# Altium PCB 175-00016_rev1 SuperFin GPIO Apps Board_Old#2.PcbDoc
Units mm, origin at the board's own origin, x right, y up, seen from the top; angles counter-clockwise.
Board outline 84 x 34.5 mm, 6 copper layers (Top Layer, Mid-Layer 1, Internal Plane 1, Internal Plane 2, Internal Plane 3, Bottom Layer); 53 components, 119 nets, 342 pads, 62 vias.
Unrouted connection lines stored in the file: 75.
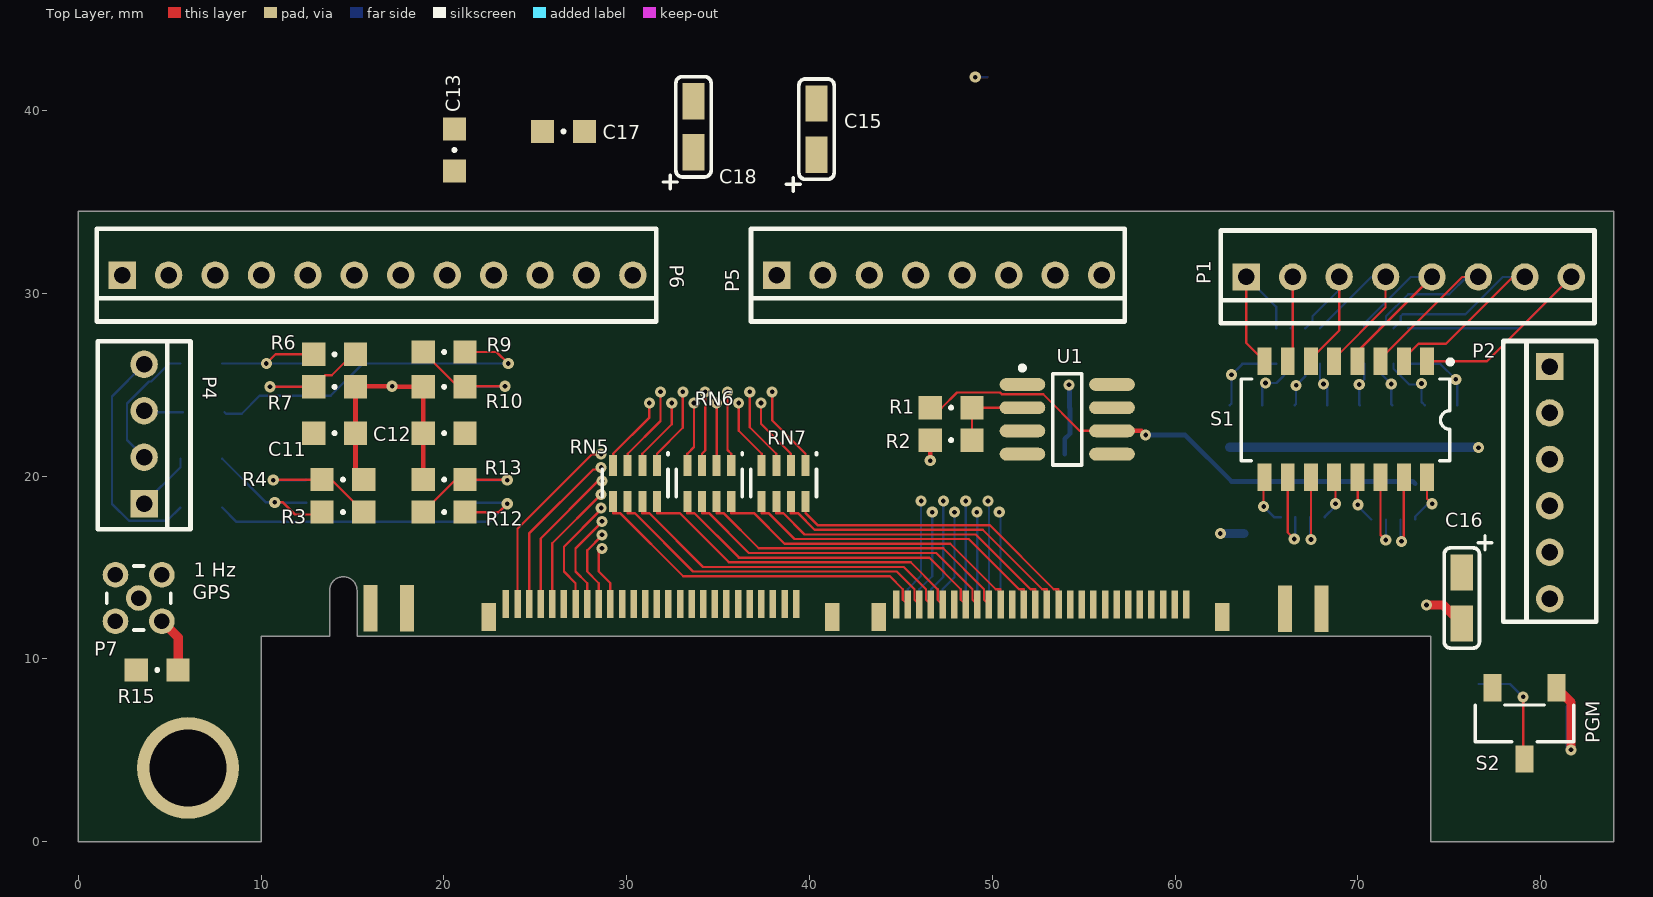
[diagram p0: Top Layer view]
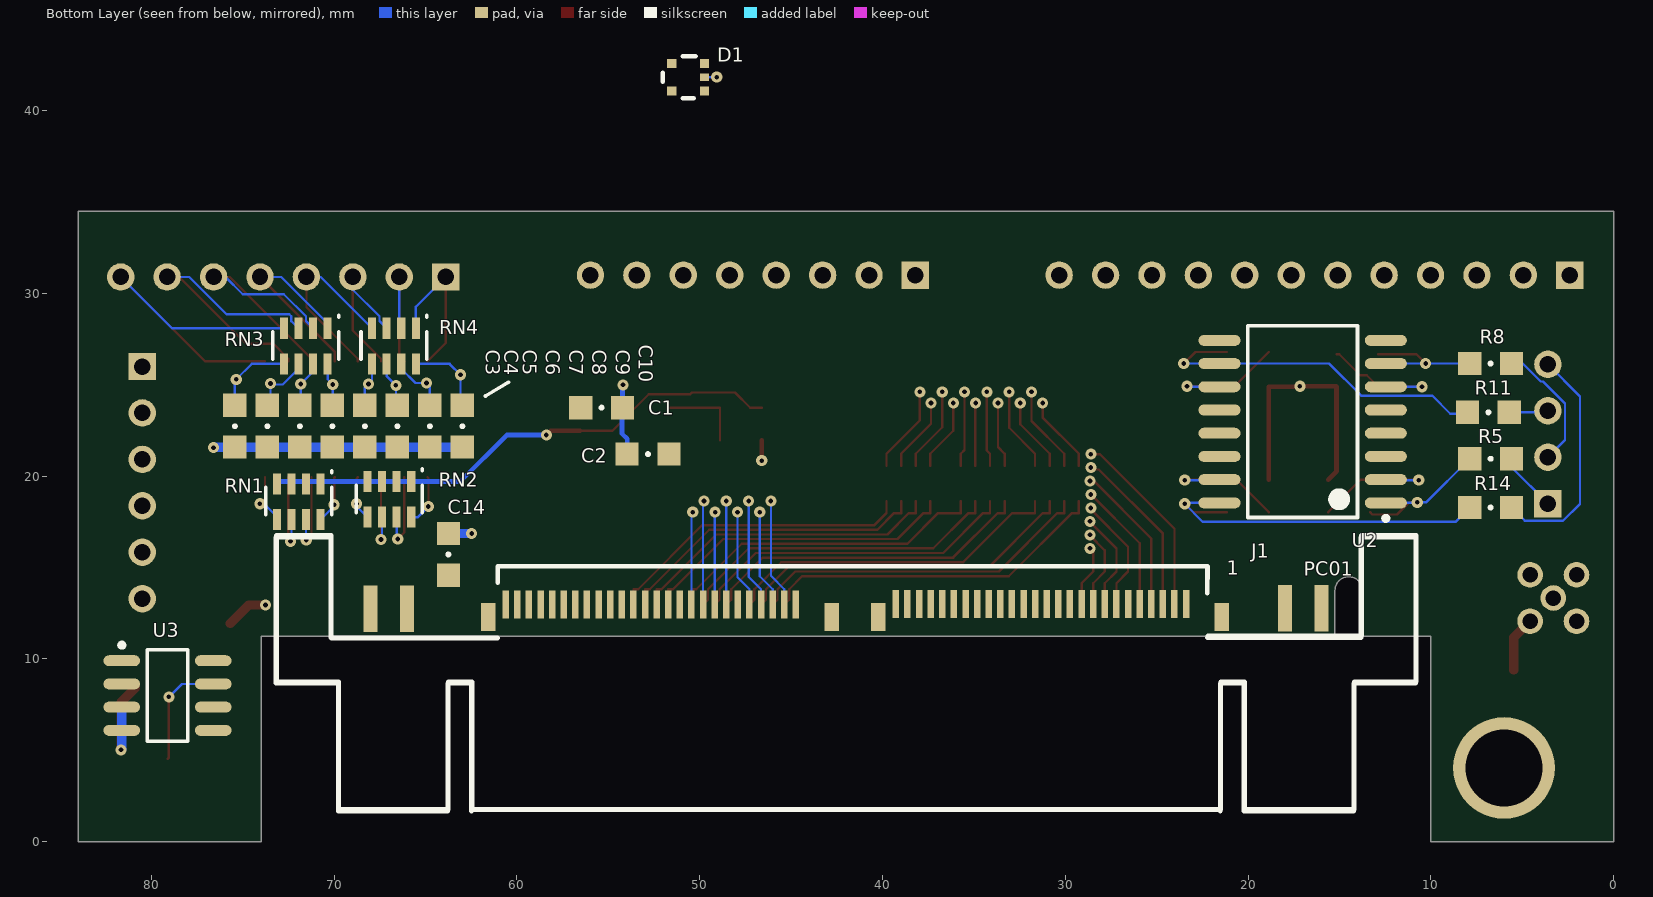
[diagram p1: Bottom Layer view, seen from below]
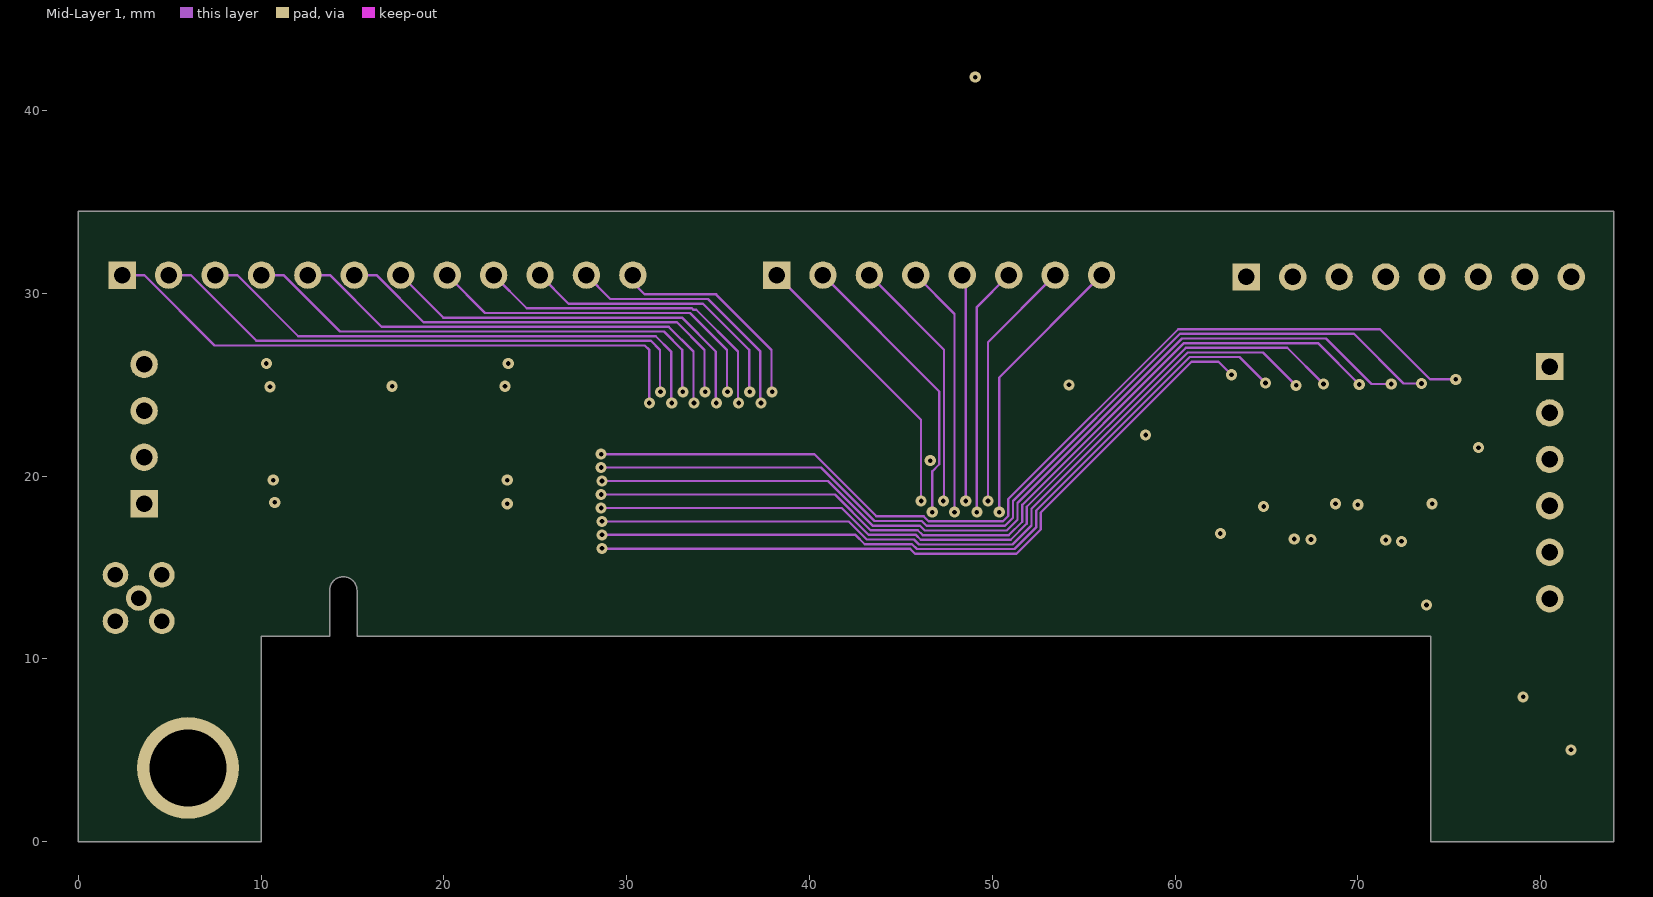
[diagram p2: Mid-Layer 1]
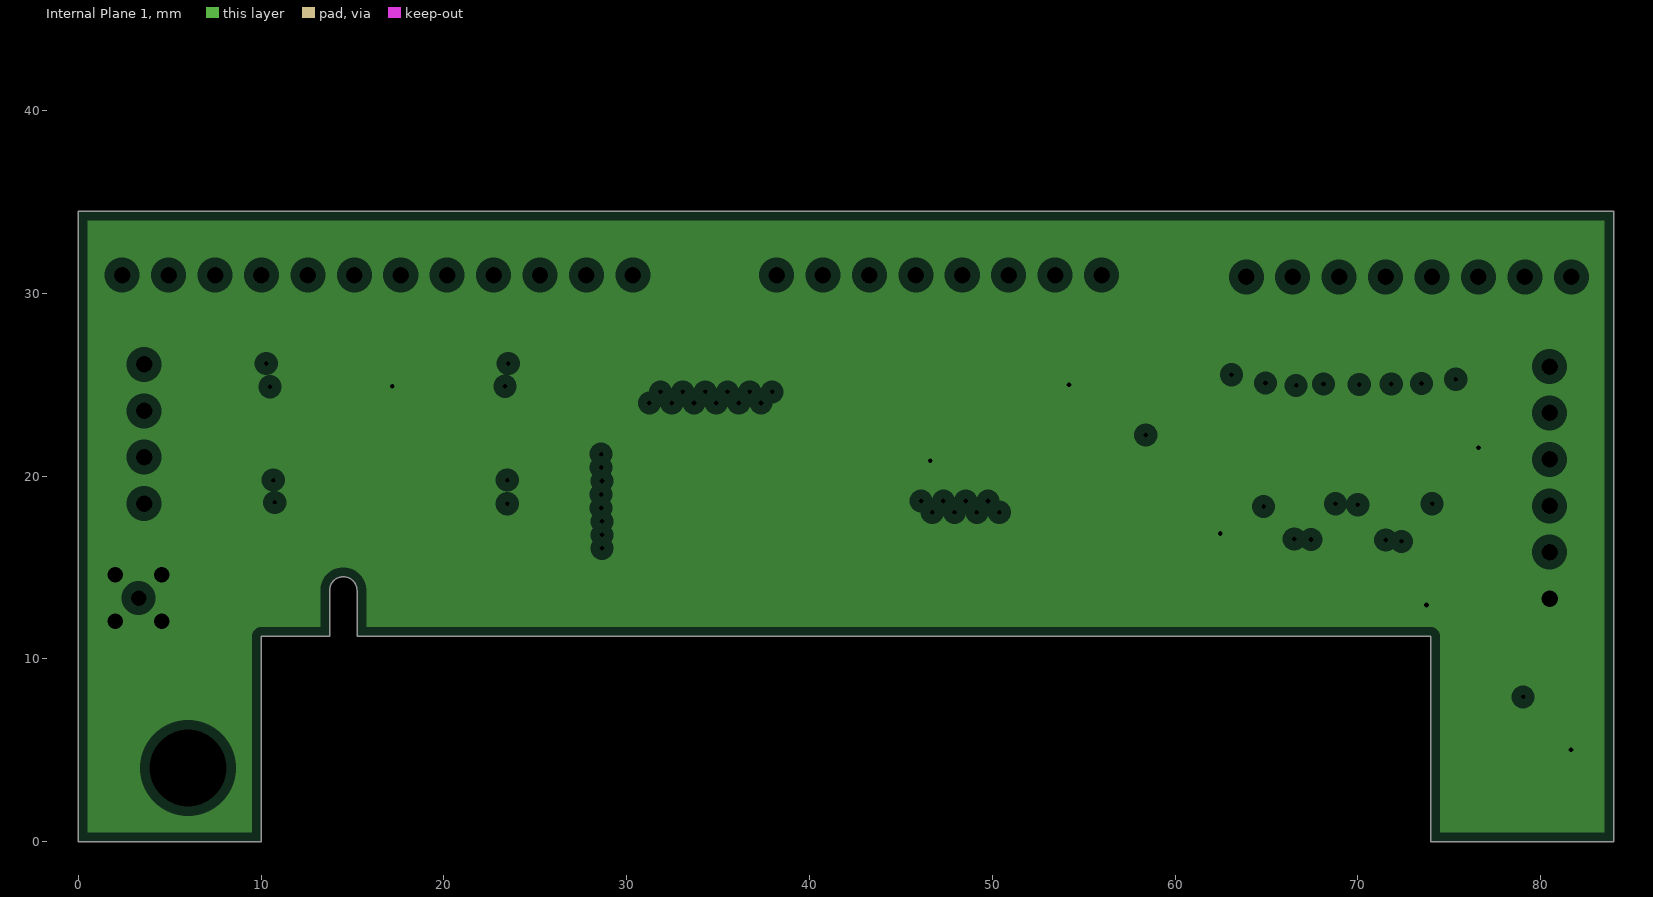
[diagram p3: Internal Plane 1, clearances drawn from the general rule]
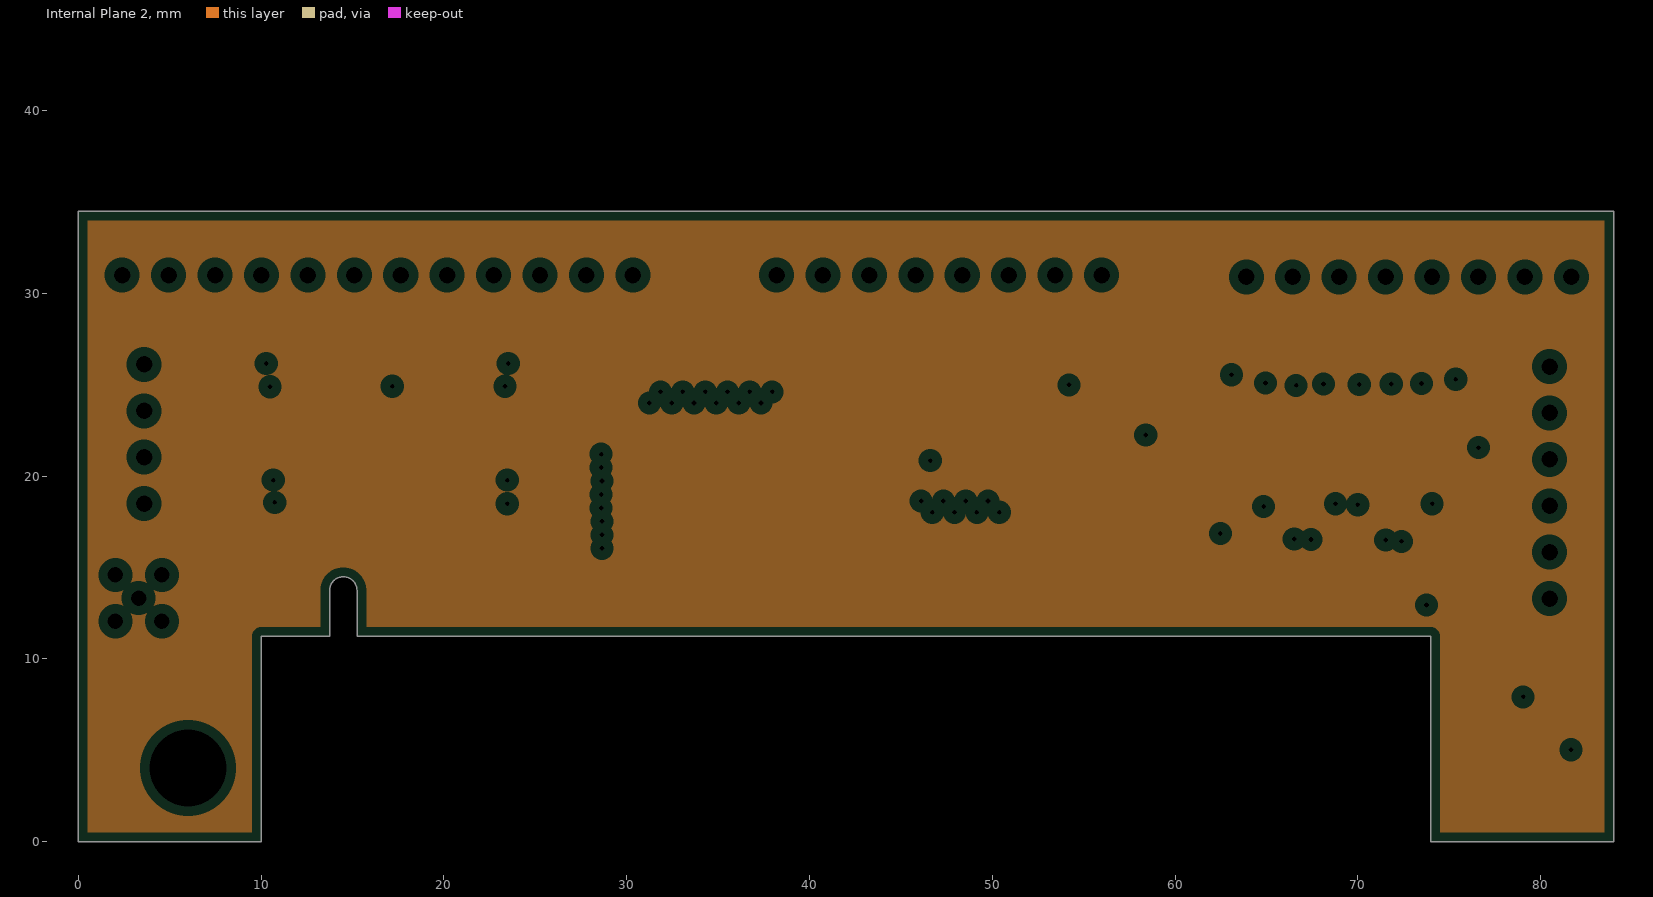
[diagram p4: Internal Plane 2, clearances drawn from the general rule]
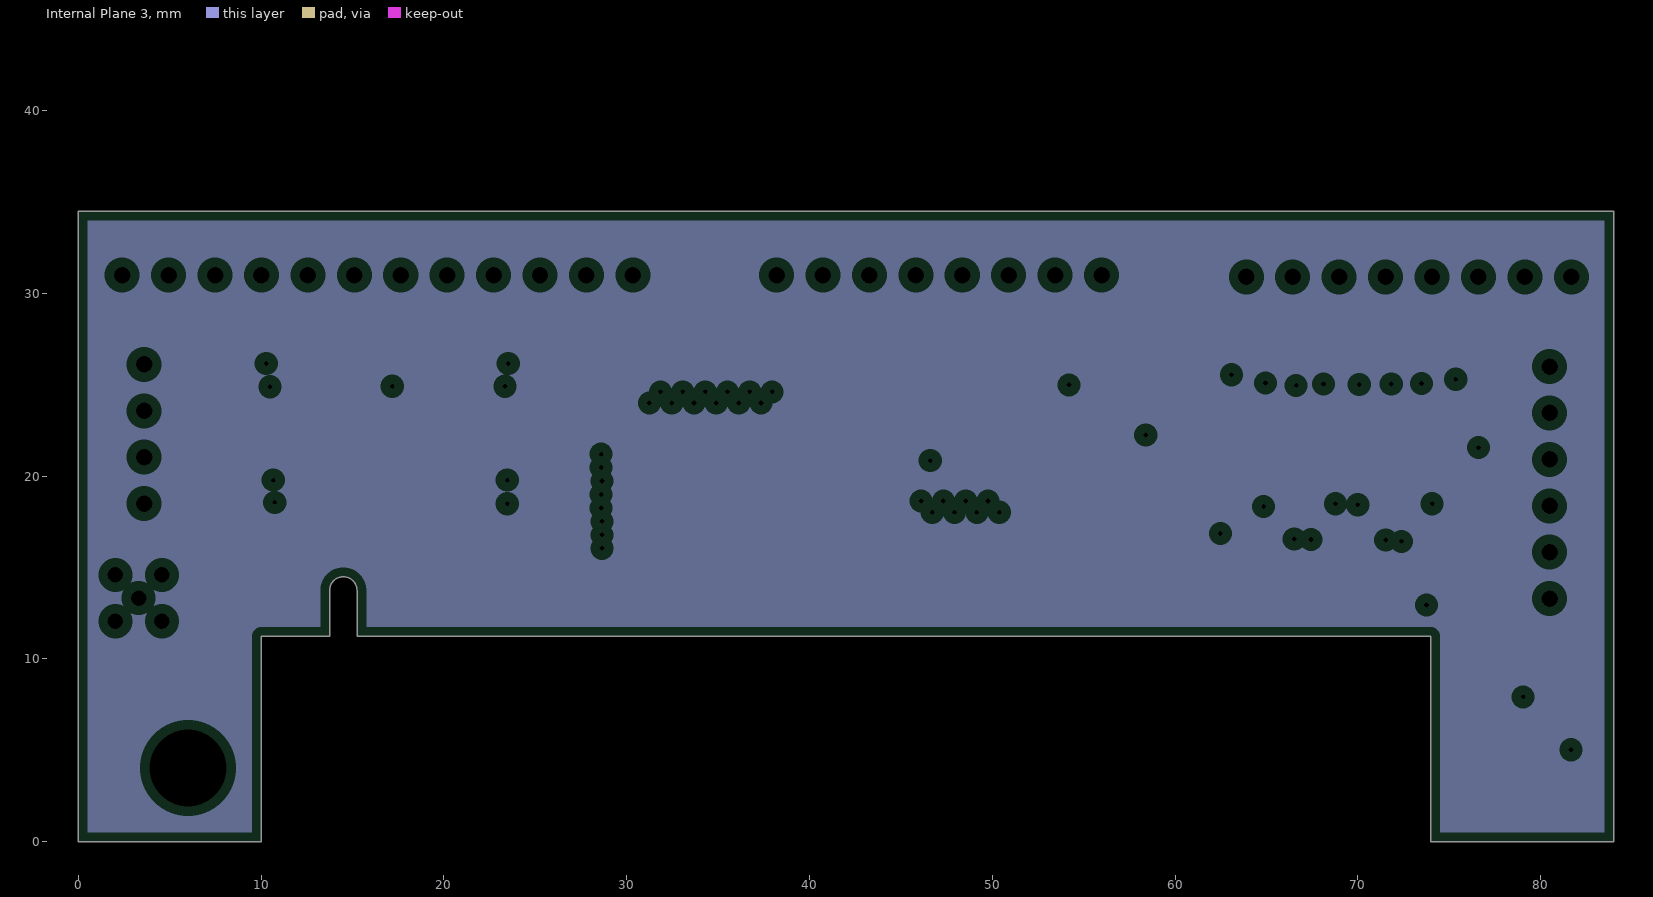
[diagram p5: Internal Plane 3, clearances drawn from the general rule]

## Layer stack, top to bottom
Top Layer: signal copper 0.0356
Dielectric: core 0.32, FR-4, Dk 4.8
Mid-Layer 1: signal copper 0.0356
Dielectric: prepreg 0.32, FR-4, Dk 4.8
Internal Plane 1: plane copper 0.0356, net GND
Dielectric: core 0.32, FR-4, Dk 4.8
Internal Plane 2: plane copper 0.0356, net +12V
Dielectric: prepreg 0.32, FR-4, Dk 4.8
Internal Plane 3: plane copper 0.0356, net -12V
Dielectric: core 0.32, FR-4, Dk 4.8
Bottom Layer: signal copper 0.0356

## Board outline
0,0 0,34.5 84,34.5 84,11.25 84,0 74,0 74,11.25 15.247,11.25 15.247,13.75 ccw(c14.497,13.75) 13.747,13.75 13.747,11.25 10,11.25 10,0

## Design rules (kind name [scope] priority, off if disabled: settings)
Clearance [All] p1: gap=0.127
ComponentClearance ComponentClearance_1 [(InComponent('J1'))] p1: gap=-10 collisioncheckmode=3 verticalgap=-10 showdistances=FALSE
ComponentClearance [All] p2: gap=0.254 collisioncheckmode=3 verticalgap=0.254 showdistances=FALSE
HoleSize [All] p1: absolutevalues=TRUE maxlimit=5.08 minlimit=0.025 maxpercent=80.000 minpercent=20.000
MinimumSolderMaskSliver [All] p1: minsoldermaskwidth=0.025
PlaneClearance [All] p1: clearance=0.508
PlaneConnect [All] p1: planeconnectstyle=Relief reliefexpansion=0.508 reliefentries=4 reliefconductorwidth=0.254 reliefairgap=0.254
PolygonConnect [All] p1: connectstyle=Relief reliefconductorwidth=0.254 reliefentries=4 polygonreliefangle="90 Angle"
RoomDefinition "780-00019 Rev1 Pg1" [InComponentClass('780-00019 Rev1 Pg1')] p1: confinementstyle=ConfineIn formatcopy=TRUE lockcomponents=FALSE outline 0.573,-14.554 83.427,-14.554 83.427,33.932 0.573,33.932
RoutingVias [All] p1: holewidth=0.254 width=0.61 viastyle="Through Hole" minholewidth=0.254 minwidth=0.61 maxholewidth=0.711 maxwidth=1.27
SilkToSilkClearance [All] p1: silktosilkclearance=0.025
SilkscreenOverComponentPads [All] p1: minsilkscreentomaskgap=0.025
SolderMaskExpansion [All] p1: expansion=0.102
Width [All] p1: maxlimit=0.508 minlimit=0.127 preferedwidth=0.127
21 further rules are at their usual default settings.

## Components (designator, comment, footprint, x,y, rotation, side; value= is the part's Value field where it differs from the comment)
C1 "Cap SMD" SMD_0805 55.372,23.749 r180 bottom
C2 "Cap SMD" SMD_0805 52.832,21.209 r0 bottom
C3 "Cap SMD" SMD_0805 75.438,22.733 r90 bottom
C4 "Cap SMD" SMD_0805 73.66,22.733 r90 bottom
C5 "Cap SMD" SMD_0805 71.882,22.733 r90 bottom
C6 "Cap SMD" SMD_0805 70.104,22.733 r90 bottom
C7 "Cap SMD" SMD_0805 68.326,22.733 r90 bottom
C8 "Cap SMD" SMD_0805 66.548,22.733 r90 bottom
C9 "Cap SMD" SMD_0805 64.77,22.733 r90 bottom
C10 "Cap SMD" SMD_0805 62.992,22.733 r90 bottom
C11 "Cap SMD" SMD_0805 14.018,22.352 r0 top
C12 "Cap SMD" SMD_0805 20.018,22.352 r180 top
C13 "Cap SMD" SMD_0805 20.574,37.846 r90 top
C14 "Cap SMD" SMD_0805 63.754,15.723 r90 bottom
C15 "16V" SMD_CAP_3216 40.386,38.989 r270 top
C16 "16V" SMD_CAP_3216 75.692,13.335 r90 top
C17 "Cap SMD" SMD_0805 26.543,38.862 r0 top
C18 "16V" SMD_CAP_3216 33.655,39.116 r270 top
D1 "PESD3V3L4UG" SOT-353 49.733,41.072 r0 bottom
J1 "QMSS-EM-PC4-104pin" "QMS EDGE PWR PINS - 104 PIN" 42,11.25 r180 bottom locked
P1 "Header 8" "HDR1X8 for IDC" 63.9,30.9 r0 top
P2 "Header 6" "HDR1X6 for IDC" 80.5,26 r270 top
P4 "Header 4" "HDR1X4 for IDC" 3.6,18.5 r90 top
P5 "Header 8" "HDR1X8 for IDC" 38.2,31 r0 top
P6 "Header 12" "HDR1X12 for IDC" 2.4,31 r0 top
P7 "COAX MMCX" MMCX2.54-V5 3.302,13.335 r0 top
R1 "Res 0805" SMD_0805 47.752,23.749 r180 top
R2 "Res 0805" SMD_0805 47.752,21.971 r0 top
R3 "Res 0805" SMD_0805 14.478,18.034 r180 top
R4 "Res 0805" SMD_0805 14.478,19.812 r180 top
R5 "Res 0805" SMD_0805 6.731,20.955 r0 bottom
R6 "Res 0805" SMD_0805 14.018,26.67 r180 top
R7 "Res 0805" SMD_0805 14.018,24.892 r180 top
R8 "Res 0805" SMD_0805 6.731,26.162 r0 bottom
R9 "Res 0805" SMD_0805 20.018,26.797 r0 top
R10 "Res 0805" SMD_0805 20.018,24.892 r0 top
R11 "Res 0805" SMD_0805 6.858,23.495 r0 bottom
R12 "Res 0805" SMD_0805 20.018,18.034 r0 top
R13 "Res 0805" SMD_0805 20.018,19.812 r0 top
R14 "Res 0805" SMD_0805 6.731,18.288 r0 bottom
R15 "Res 0805" SMD_0805 4.318,9.398 r180 top
RN1 "RES ARRAY  x4 10K" "RES ARRAY 0603 x 4" 70.739,19.685 r0 bottom
RN2 "RES ARRAY  x4 10K" "RES ARRAY 0603 x 4" 65.786,19.812 r0 bottom
RN3 "RES ARRAY  x4 10K" "RES ARRAY 0603 x 4" 70.358,28.194 r0 bottom
RN4 "RES ARRAY  x4 10K" "RES ARRAY 0603 x 4" 65.532,28.194 r0 bottom
RN5 "RES ARRAY  x4 10K" "RES ARRAY 0603 x 4" 31.658,20.676 r180 top
RN6 "RES ARRAY  x4 10K" "RES ARRAY 0603 x 4" 35.722,20.676 r180 top
RN7 "RES ARRAY  x4 10K" "RES ARRAY 0603 x 4" 39.786,20.676 r180 top
S1 "SW DIP-8 Half Pitch" "SW DIP 8 pos half pitch" 69.342,23.114 r270 top
S2 "CJS-1200TB" CAS-120B 79.121,6.477 r180 top
U1 "LT1007CS8#PBF" S8_M 54.102,23.114 r0 top
U2 "LT1014ISW#PBF" SW16_N 17.018,22.987 r0 bottom
U3 "M24C32RMN1" SOP8_N 79.121,8.001 r180 bottom

## Footprints (in the part's own frame and the unit in brackets; to place one, negate y for a bottom-side part, rotate by r counter-clockwise, add the part's x,y. Pads: shape width x height; smd on the part's side, far side on the other; paste and mask are expansions set on the pad)
CAS-120B [mm] "Copal Electronics CAS SMD Slide Switch"
  rect 1x1.5 smd: 1(-1.75,-1.95) 2(0,1.95) 3(1.75,-1.95)
  silkscreen extent -2.69,-1 2.69,1
"HDR1X4 for IDC" [mm] "Connector; Header; 4 Position"
  rect 1.5x1.5 hole 0.9: 1(0,0)
  round 1.5 hole 0.9: 2(2.54,0) 3(5.08,0) 4(7.62,0)
  silkscreen extent -1.4,-2.54 8.89,2.54
"HDR1X6 for IDC" [mm] "Connector; Header; 6 Position"
  rect 1.5x1.5 hole 0.9: 1(0,0)
  round 1.5 hole 0.9: 2(2.54,0) 3(5.08,0) 4(7.62,0) 5(10.16,0) 6(12.7,0)
  silkscreen extent -1.4,-2.54 13.97,2.54
"HDR1X8 for IDC" [mm] "Connector; Header; 8 Position"
  rect 1.5x1.5 hole 0.9: 1(0,0)
  round 1.5 hole 0.9: 2(2.54,0) 3(5.08,0) 4(7.62,0) 5(10.16,0) 6(12.7,0) 7(15.24,0) 8(17.78,0)
  silkscreen extent -1.4,-2.54 19.05,2.54
"HDR1X12 for IDC" [mm] "Connector; Header; 12 Position"
  rect 1.5x1.5 hole 0.9: 1(0,0)
  round 1.5 hole 0.9: 2(2.54,0) 3(5.08,0) 4(7.62,0) 5(10.16,0) 6(12.7,0) 7(15.24,0) 8(17.78,0) 9(20.32,0) 10(22.86,0) 11(25.4,0) 12(27.94,0)
  silkscreen extent -1.4,-2.54 29.21,2.54
MMCX2.54-V5 [mm] "Connector; RF Coaxial, MMCX, Thru-Hole; 5 Position; Vertical"
  round 1.4 hole 0.85: 1(0,0) 2(-1.27,-1.27) 3(1.27,-1.27) 4(1.27,1.27) 5(-1.27,1.27)
  silkscreen extent -1.75,-1.75 1.75,1.75
"QMS EDGE PWR PINS - 104 PIN" [mil] "52 pos (104 pin) + 8 pwr pins"
  rect 14x60 smd: 1(732.45,69.15) 3(707.45,69.15) 5(682.45,69.15) 7(657.45,69.15) 9(632.45,69.15) 11(607.45,69.15) 13(582.45,69.15) 15(557.45,69.15) 17(532.45,69.15) 19(507.45,69.15) 21(482.45,69.15) 23(457.45,69.15) 25(432.45,69.15) 27(407.45,69.15) 29(382.45,69.15) 31(357.45,69.15) 33(332.45,69.15) 35(307.45,69.15) 37(282.45,69.15) 39(257.45,69.15) 41(232.45,69.15) 43(207.45,69.15) 45(182.45,69.15) 47(157.45,69.15) 49(132.45,69.15) 51(107.45,69.15) 53(-107.89,68.09) 55(-132.89,68.09) 57(-157.89,68.09) 59(-182.89,68.09) 61(-207.89,68.09) 63(-232.89,68.09) 65(-257.89,68.09) 67(-282.89,68.09) 69(-307.89,68.09) 71(-332.89,68.09) 73(-357.89,68.09) 75(-382.89,68.09) 77(-407.89,68.09) 79(-432.89,68.09) 81(-457.89,68.09) 83(-482.89,68.09) 85(-507.89,68.09) 87(-532.89,68.09) 89(-557.89,68.09) 91(-582.89,68.09) 93(-607.89,68.09) 95(-632.89,68.09) 97(-657.89,68.09) 99(-682.89,68.09) 101(-707.89,68.09) 103(-732.89,68.09)
  rect 14x60 smd far side: 2(732.45,69.15) 4(707.45,69.15) 6(682.45,69.15) 8(657.45,69.15) 10(632.45,69.15) 12(607.45,69.15) 14(582.45,69.15) 16(557.45,69.15) 18(532.45,69.15) 20(507.45,69.15) 22(482.45,69.15) 24(457.45,69.15) 26(432.45,69.15) 28(407.45,69.15) 30(382.45,69.15) 32(357.45,69.15) 34(332.45,69.15) 36(307.45,69.15) 38(282.45,69.15) 40(257.45,69.15) 42(232.45,69.15) 44(207.45,69.15) 46(182.45,69.15) 48(157.45,69.15) 50(132.45,69.15) 52(107.45,69.15) 54(-107.89,68.09) 56(-132.89,68.09) 58(-157.89,68.09) 60(-182.89,68.09) 62(-207.89,68.09) 64(-232.89,68.09) 66(-257.89,68.09) 68(-282.89,68.09) 70(-307.89,68.09) 72(-332.89,68.09) 74(-357.89,68.09) 76(-382.89,68.09) 78(-407.89,68.09) 80(-432.89,68.09) 82(-457.89,68.09) 84(-482.89,68.09) 86(-507.89,68.09) 88(-532.89,68.09) 90(-557.89,68.09) 92(-582.89,68.09) 94(-607.89,68.09) 96(-632.89,68.09) 98(-657.89,68.09) 100(-682.89,68.09) 102(-707.89,68.09) 104(-732.89,68.09)
  rect 31x60 smd: 105(809.45,41.09) 107(69.45,41.09) 109(-30.55,41.09) 111(-770.55,41.09)
  rect 31x60 smd far side: 106(769.45,41.09) 108(29.45,41.09) 110(-70.55,41.09) 112(-810.55,41.09)
  rect 30x100 smd: PC01(1024.45,59.65) PC03(945.55,59.65) PC05(-945.55,59.15) PC07(-1024.45,59.15)
  rect 30x100 smd far side: PC02(1024.45,59.65) PC04(945.55,59.65) PC06(-945.55,59.15) PC08(-1024.45,59.15)
  silkscreen extent -1228,-377 1229,217
"RES ARRAY 0603 x 4" [mm]
  rect 0.44x1.15 smd: 1(0,0.1) 2(0,2.05) 3(0.8,0.1) 4(0.8,2.05) 5(1.6,0.1) 6(1.6,2.05) 7(2.4,0.1) 8(2.4,2.05)
  silkscreen extent -0.6,-0.6 3,1.8
S8_M [mm] "SOIC, 8-Leads, Body 4.9x3.9mm, Pitch 1.27mm, IPC Low Density"
  oval 2.5x0.7 smd: 1(-2.45,1.905) 2(-2.45,0.635) 3(-2.45,-0.635) 4(-2.45,-1.905) 5(2.45,-1.905) 6(2.45,-0.635) 7(2.45,0.635) 8(2.45,1.905)
  silkscreen extent -2.57,-2.5 0.8,2.93, body extent -2,-2.5 2,2.5, height 1.76
SMD_0805 [mil]
  rect 50x50 smd: 1(-45,0) 2(45,0)
  silkscreen extent -1,-1 1,1
SMD_CAP_3216 [mil]
  rect 78x48 smd: 1(55,0) 2(-55,0)
  silkscreen extent -108,-65 134,38
SOP8_N [mm] "SOIC, 8-Leads, Body 4.9x3.9mm, Pitch 1.27mm, IPC Medium Density"
  oval 2x0.6 smd: 1(-2.5,1.905) 2(-2.5,0.635) 3(-2.5,-0.635) 4(-2.5,-1.905) 5(2.5,-1.905) 6(2.5,-0.635) 7(2.5,0.635) 8(2.5,1.905)
  silkscreen extent -2.63,-2.5 1.1,2.88, body extent -2,-2.5 2,2.5, height 1.75
SOT-353 [mm]
  rect 0.5x0.5 smd: 1(0,0) 3(0,-1.5) 4(1.8,-1.5) 5(1.8,0)
  rect 0.5x0.4 smd: 2(0,-0.75)
  silkscreen extent 0.5,-1.9 2.3,0.4
SW16_N [mm] "SOIC, 16-Leads, Body 10.3x7.5mm, Pitch 1.27mm, IPC Medium Density"
  oval 2.3x0.6 smd: 1(-4.55,4.445) 2(-4.55,3.175) 3(-4.55,1.905) 4(-4.55,0.635) 5(-4.55,-0.635) 6(-4.55,-1.905) 7(-4.55,-3.175) 8(-4.55,-4.445) 9(4.55,-4.445) 10(4.55,-3.175) 11(4.55,-1.905) 12(4.55,-0.635) 13(4.55,0.635) 14(4.55,1.905) 15(4.55,3.175) 16(4.55,4.445)
  silkscreen extent -4.67,-5.25 3,5.42, body extent -3.75,-5.25 3.75,5.25, height 2.65
"SW DIP 8 pos half pitch" [mil] "Grayhill 97C08ST, 8 SPST switch, surface mount"
  rect 60x30 smd: 1(-125,175) 2(-125,125) 3(-125,75) 4(-125,25) 5(-125,-25) 6(-125,-75) 7(-125,-125) 8(-125,-175) 9(125,-175) 10(125,-125) 11(125,-75) 12(125,-25) 13(125,25) 14(125,75) 15(125,125) 16(125,175)
  silkscreen extent -128,-225 90,230

## Part data
C1 C2 C11 C12 C13 C14 C17: "Capacitor"
C3 C4 C5 C6 C7 C8 C9 C10: "Capacitor NP0"
C15 C16 C18: library part "Cap Tant 16V", "outline 3.2mm x 1.6mm"
D1: library part "ESD Diode 3.3V Quad", "Quad ESD Diode 3.3V"
J1: "SAMTEC QMSS EDGE W/PWR PINS"
P1 P5: "Header, 8-Pin"
P2: "Header, 6-Pin"
P4: "Header, 4-Pin"
P6: "Header, 12-Pin"
P7: library part COAX-M, "RF Coaxial PCB Connector, MMCX; Thru-Hole, Vertical Mount Plug,  50 Ohm Impedance"
R1 R2 R3 R4 R5 R6 R7 R8 R9 R10 R11 R12 R13 R14 R15: library part "Res SMD", "Resistor 0805"
RN1 RN2 RN3 RN4 RN5 RN6 RN7: "Resistor Array 4 Isolated"
S1: "DIP Switch, 8 Position, SPST"
S2: library part SW_SPDT_DOUG
U1: "Low Noise BJT input opamp"
U2: "Quad Precision Operational Amplifier"
U3: "32 Kbit Serial I²C Bus EEPROM"

## Free pads (board coordinates)
  round 5.56 hole 4.22 unplated: 0(6,4.04)

## Via types
v1: diameter 0.61, hole 0.254, Top Layer to Bottom Layer, 62 vias

## Nets (pads, with @x,y where several pads share a name; then routed paths per layer and width w, separated by ;. In a path a pad name is that pad's centre, name@x,y a point inside that pad or via, vN(x,y) a via of type N, cw(c..) or ccw(c..) an arc to the next point about the centre after c; other vN are vias at no path point)
2.500VREF: J1.5 U1.3
4.096VREF: J1.3
+3.3V: C14.1 C16.1 J1.PC02 P2.5 S2.3 U3.8
+5V: J1.PC04
+12V: C1.1 C11.1 C13.1 C15.1 J1.PC06 U1.7 U2.4
+24V: J1.PC07
+48V: J1.PC03
-12V: C2.1 C12.1 C17.2 C18.2 J1.PC08 U1.4 U2.13
ANALOG_IN0: C3.2 J1.4 RN3.8 | length 69.1
  Top Layer w0.127: J1.4 24.031,14.78 24.028,14.783 24.028,17.121 28.116,21.209 v1(28.6,21.209)
  Mid-Layer 1 w0.127: v1(28.6,21.209) 40.259,21.209 43.663,17.805 46.246,17.805 46.513,17.538 50.588,17.538 50.878,17.828 50.878,18.747 60.173,28.042 71.211,28.042 73.954,25.298 v1(75.362,25.298)
  Bottom Layer w0.127: RN3.8 74.516,26.144 v1(75.362,25.298) 75.438,25.222 C3.2
ANALOG_IN1: C4.2 J1.6 RN3.6 | length 64.9
  Top Layer w0.127: J1.6 24.666,14.78 24.663,14.783 24.663,16.858 28.176,20.371 28.499,20.371 v1(28.6,20.472)
  Mid-Layer 1 w0.127: v1(28.6,20.472) 40.636,20.472 43.557,17.551 46.14,17.551 46.408,17.284 50.693,17.284 51.132,17.723 51.132,18.641 60.278,27.788 69.788,27.788 72.506,25.07 v1(73.482,25.07)
  Bottom Layer w0.127: RN3.6 71.958,25.88 72.819,25.019 73.431,25.019 v1(73.482,25.07) 73.482,24.054 C4.2
ANALOG_IN2: C5.2 J1.8 RN3.4 | length 61
  Top Layer w0.127: J1.8 25.301,14.78 25.298,14.783 25.298,16.595 28.439,19.736 v1(28.651,19.736)
  Mid-Layer 1 w0.127: v1(28.651,19.736) 41.014,19.736 43.452,17.297 46.035,17.297 46.303,17.03 50.798,17.03 51.386,17.617 51.386,18.536 60.383,27.534 68.264,27.534 70.754,25.044 v1(71.831,25.044)
  Bottom Layer w0.127: RN3.4 71.158,25.718 v1(71.831,25.044) 71.831,23.927 C5.2
ANALOG_IN3: C6.2 J1.10 RN3.2 | length 57.7
  Top Layer w0.127: J1.10 25.936,14.78 25.933,14.783 25.933,16.332 v1(28.6,18.999)
  Mid-Layer 1 w0.127: v1(28.6,18.999) 41.391,18.999 43.347,17.043 45.93,17.043 46.198,16.776 50.903,16.776 51.64,17.512 51.64,18.431 60.488,27.28 67.818,27.28 v1(70.079,25.019)
  Bottom Layer w0.127: C6.2 70.079,23.901 v1(70.079,25.019) 70.358,25.298 RN3.2
ANALOG_IN4: C7.2 J1.14 RN4.8 | length 54.7
  Top Layer w0.127: J1.14 27.206,14.145 26.568,14.783 26.568,16.144 28.6,18.176 v1(28.6,18.263)
  Mid-Layer 1 w0.127: v1(28.6,18.263) 41.769,18.263 43.242,16.789 45.825,16.789 46.093,16.522 51.008,16.522 51.894,17.407 51.894,18.326 60.594,27.026 66.142,27.026 v1(68.123,25.044)
  Bottom Layer w0.127: RN4.8 67.932,25.235 v1(68.123,25.044) 68.326,24.841 C7.2
ANALOG_IN5: C8.2 J1.16 RN4.6 | length 52
  Top Layer w0.127: J1.16 27.841,14.145 27.203,14.783 27.203,16.042 28.651,17.49 v1(28.651,17.526)
  Mid-Layer 1 w0.127: v1(28.651,17.526) 42.146,17.526 43.137,16.535 45.72,16.535 45.987,16.268 51.114,16.268 52.148,17.302 52.148,18.221 60.699,26.772 64.821,26.772 v1(66.624,24.968)
  Bottom Layer w0.127: C8.2 66.624,23.952 v1(66.624,24.968) 67.132,25.476 RN4.6
ANALOG_IN6: C9.2 J1.18 RN4.4 | length 49.7
  Top Layer w0.127: J1.18 28.476,14.145 27.838,14.783 27.838,15.94 28.651,16.753 v1(28.651,16.789)
  Mid-Layer 1 w0.127: v1(28.651,16.789) 42.523,16.789 43.031,16.281 45.614,16.281 45.882,16.014 51.219,16.014 52.402,17.197 52.402,18.115 60.804,26.518 63.525,26.518 v1(64.948,25.095)
  Bottom Layer w0.127: C9.2 64.77,24.917 v1(64.948,25.095) 65.548,25.095 66.332,25.88 RN4.4
ANALOG_IN7: C10.2 J1.20 RN4.2 | length 47.5
  Top Layer w0.127: v1(28.651,16.053) 28.473,15.875 28.473,14.783 29.111,14.145 J1.20
  Mid-Layer 1 w0.127: v1(28.651,16.053) 28.677,16.027 45.509,16.027 45.777,15.76 51.324,15.76 52.656,17.091 52.656,18.01 60.909,26.264 62.382,26.264 v1(63.094,25.552)
  Bottom Layer w0.127: C10.2 63.094,23.978 v1(63.094,25.552) 63.685,26.144 RN4.2
DAC_OUT0: J1.13 U2.3
DAC_OUT1: J1.15 U2.5
DAC_OUT2: J1.17 U2.12
DAC_OUT3: J1.19 U2.14
DIRECTION1: J1.99
DIRECTION2: J1.101
GND: C1.2 C2.2 C3.1 C4.1 C5.1 C6.1 C7.1 C8.1 C9.1 C10.1 C11.2 C12.2 C13.2 C14.2 C15.2 C16.2 C17.1 C18.1 D1.2 J1.1 J1.2 J1.11 J1.12 J1.21 J1.22 J1.31 J1.32 J1.41 J1.42 J1.51 J1.52 J1.53 J1.54 J1.63 J1.64 J1.73 J1.74 J1.83 J1.84 J1.93 J1.94 J1.103 J1.104 J1.105 J1.106 J1.107 J1.108 J1.109 J1.110 J1.111 J1.112 J1.PC01 J1.PC05 P2.6 P7.2 P7.3 P7.4 P7.5 R2.1 R4.1 R7.1 R10.1 R13.1 R15.1 S2.1 U3.3 U3.4 | length 46.1
  Top Layer w0.254: R4.1 15.161,20.272 R7.1 15.186,24.917 v1(17.17,24.917) 17.196,24.892 R10.1 C12.2 R13.1 ; v1(46.609,20.853) R2.1
  Top Layer w0.508: P7.3 5.461,11.176 R15.1 ; v1(73.762,12.954) 74.676,12.954 C16.2 ; S2.1 81.661,7.637 v1(81.661,5.029)
  Bottom Layer w0.127: v1(49.073,41.834) 49.085,41.822 D1.2
  Bottom Layer w0.254: C2.2 53.975,22.047 54.254,22.327 54.254,23.724 C1.2 54.229,24.968 v1(54.204,24.994)
  Bottom Layer w0.508: v1(62.484,16.866) C14.2 ; C10.1 76.581,21.59 v1(76.606,21.565) ; U3.3 U3.4 81.621,5.069 v1(81.661,5.029)
GP_I/OSPARE0: D1.5 J1.33 P2.1
GP_I/OSPARE1: D1.4 J1.35 P2.2
GP_I/OSPARE2: D1.3 J1.37 P7.1 R15.2
GP_I/OSPARE3: D1.1 J1.39
GP_I/OSPARE4: J1.43
GP_I/OSPARE5: J1.45
GP_I/OSPARE6: J1.47
GP_OUT_D0: J1.55 P5.1 | length 21.6
  Mid-Layer 1 w0.127: P5.1 46.108,23.092 v1(46.108,18.644)
  Bottom Layer w0.127: J1.55 45.375,13.815 46.108,14.548 v1(46.108,18.644)
GP_OUT_D1: J1.57 P5.2 | length 21.1
  Mid-Layer 1 w0.127: P5.2 47.104,24.636 47.104,20.648 46.719,20.262 v1(46.719,18.033)
  Bottom Layer w0.127: J1.57 46.01,13.815 46.719,14.523 v1(46.719,18.033)
GP_OUT_D2: J1.59 P5.3 | length 20
  Mid-Layer 1 w0.127: P5.3 47.358,26.922 47.358,18.673 v1(47.329,18.644)
  Bottom Layer w0.127: J1.59 46.645,13.815 47.329,14.499 v1(47.329,18.644)
GP_OUT_D3: J1.61 P5.4 | length 19.2
  Mid-Layer 1 w0.127: P5.4 47.94,28.88 v1(47.94,18.033)
  Bottom Layer w0.127: J1.61 47.28,13.815 47.94,14.475 v1(47.94,18.033)
GP_OUT_D4: J1.65 P5.5 | length 18.1
  Mid-Layer 1 w0.127: P5.5 48.55,30.81 v1(48.55,18.644)
  Bottom Layer w0.127: J1.65 v1(48.55,18.644)
GP_OUT_D5: J1.67 P5.6 | length 18.8
  Mid-Layer 1 w0.127: v1(49.161,18.033) 49.161,29.261 P5.6
  Bottom Layer w0.127: v1(49.161,18.033) 49.185,18.009 J1.67
GP_OUT_D6: J1.69 P5.7 | length 19.6
  Mid-Layer 1 w0.127: v1(49.772,18.644) 49.772,27.332 P5.7
  Bottom Layer w0.127: v1(49.772,18.644) 49.82,18.595 J1.69
GP_OUT_D7: J1.71 P5.8 | length 20.4
  Mid-Layer 1 w0.127: v1(50.382,18.033) 50.382,25.402 P5.8
  Bottom Layer w0.127: v1(50.382,18.033) 50.455,17.96 J1.71
GP_OUT_D8: J1.75
GP_OUT_D9: J1.77
GP_OUT_D10: J1.79
GP_OUT_D11: J1.81
GP_OUT_D12: J1.85
GP_OUT_D13: J1.87
GP_OUT_D14: J1.89
GP_OUT_D15: J1.91
I2C_SCL: J1.50 P2.4 U3.6
I2C_SDA: J1.48 P2.3 U3.5
NetP1_1: P1.1 RN4.1 S1.8 | length 8.5
  Top Layer w0.127: P1.1 63.9,27.286 S1.8
  Bottom Layer w0.127: P1.1 65.532,29.268 RN4.1
NetP1_2: P1.2 RN4.3 S1.7 | length 7.6
  Top Layer w0.127: S1.7 66.44,26.562 P1.2
  Bottom Layer w0.127: RN4.3 66.44,28.202 P1.2
NetP1_3: P1.3 RN4.5 S1.6 | length 8.8
  Top Layer w0.127: S1.6 67.437,26.431 68.98,27.974 P1.3
  Bottom Layer w0.127: RN4.5 67.522,28.484 67.522,28.748 68.98,30.206 P1.3
NetP1_4: P1.4 RN4.7 S1.5 | length 10.5
  Top Layer w0.127: S1.5 68.707,26.431 71.52,29.244 P1.4
  Bottom Layer w0.127: RN4.7 70.738,30.9 P1.4
NetP1_5: P1.5 RN3.1 S1.4 | length 11.3
  Top Layer w0.127: S1.4 69.977,26.817 P1.5
  Bottom Layer w0.127: RN3.1 70.358,28.358 72.9,30.9 P1.5
NetP1_6: P1.6 RN3.3 S1.3 | length 14.1
  Top Layer w0.127: S1.3 71.247,26.431 75.716,30.9 P1.6
  Bottom Layer w0.127: RN3.3 71.547,28.483 71.547,28.748 72.759,29.959 75.001,29.959 75.941,30.9 P1.6
NetP1_7: P1.7 RN3.5 S1.2 | length 17.1
  Top Layer w0.127: S1.2 72.517,26.431 73.327,27.241 74.823,27.241 78.481,30.9 P1.7
  Bottom Layer w0.127: RN3.5 72.348,28.484 72.348,28.748 72.459,28.86 75.89,28.86 77.93,30.9 P1.7
NetP1_8: P1.8 RN3.7 S1.1 | length 19.9
  Top Layer w0.127: S1.1 77.069,26.289 P1.8
  Bottom Layer w0.127: RN3.7 78.874,28.094 P1.8
NetP4_1: P4.1 R5.1 | length 3.3
  Bottom Layer w0.127: P4.1 5.588,20.488 R5.1
NetP4_2: P4.2 R8.1 | length 7.2
  Bottom Layer w0.127: P4.2 2.659,21.981 2.659,23.97 3.869,25.18 3.99,25.18 4.972,26.162 R8.1
NetP4_3: P4.3 R11.1 | length 2.2
  Bottom Layer w0.127: P4.3 3.685,23.495 R11.1
NetP4_4: P4.4 R14.1 | length 12.8
  Bottom Layer w0.127: P4.4 1.846,24.366 1.846,18.484 2.771,17.56 4.86,17.56 R14.1
NetP6_1: P6.12 RN7.1 | length 16.6
  Top Layer w0.127: v1(37.959,24.614) 37.959,23.059 39.786,21.232 RN7.1
  Mid-Layer 1 w0.127: P6.12 30.34,30.595 30.988,29.947 34.893,29.947 37.927,26.912 37.927,24.646 v1(37.959,24.614)
NetP6_2: P6.11 RN7.3 | length 18.2
  Top Layer w0.127: v1(37.349,24.003) 37.349,22.87 38.986,21.232 RN7.3
  Mid-Layer 1 w0.127: P6.11 29.107,29.693 34.446,29.693 37.317,26.822 37.317,24.035 v1(37.349,24.003)
NetP6_3: P6.10 RN7.5 | length 20.1
  Top Layer w0.127: v1(36.738,24.614) 36.738,22.68 38.186,21.232 RN7.5
  Mid-Layer 1 w0.127: P6.10 26.821,29.439 34.18,29.439 36.706,26.912 36.706,24.646 v1(36.738,24.614)
NetP6_4: P6.9 RN7.7 | length 21.9
  Top Layer w0.127: v1(36.127,24.003) 36.127,22.491 37.386,21.232 RN7.7
  Mid-Layer 1 w0.127: P6.9 24.535,29.185 33.571,29.185 33.647,29.109 33.808,29.109 36.095,26.822 36.095,24.035 v1(36.127,24.003)
NetP6_5: P6.8 RN6.1 | length 23.4
  Top Layer w0.127: v1(35.517,24.614) 35.517,21.438 35.722,21.232 RN6.1
  Mid-Layer 1 w0.127: P6.8 22.249,28.931 33.466,28.931 35.485,26.912 35.485,24.646 v1(35.517,24.614)
NetP6_6: P6.7 RN6.3 | length 25.2
  Top Layer w0.127: v1(34.906,24.003) 34.922,23.987 RN6.3
  Mid-Layer 1 w0.127: P6.7 19.963,28.677 33.02,28.677 34.874,26.822 34.874,24.035 v1(34.906,24.003)
NetP6_7: P6.6 RN6.5 | length 27.3
  Top Layer w0.127: RN6.5 34.122,21.232 34.295,21.405 v1(34.295,24.614)
  Mid-Layer 1 w0.127: P6.6 16.31,31 18.887,28.423 32.753,28.423 34.263,26.912 34.263,24.646 v1(34.295,24.614)
NetP6_8: P6.5 RN6.7 | length 29.2
  Top Layer w0.127: RN6.7 33.322,21.232 33.685,21.595 v1(33.685,24.003)
  Mid-Layer 1 w0.127: P6.5 13.77,31 16.601,28.169 32.306,28.169 33.653,26.822 33.653,24.035 v1(33.685,24.003)
NetP6_9: P6.4 RN5.1 | length 31.7
  Top Layer w0.127: RN5.1 31.658,21.232 33.074,22.648 v1(33.074,24.614)
  Mid-Layer 1 w0.127: P6.4 11.23,31 14.315,27.915 32.04,27.915 33.042,26.912 33.042,24.646 v1(33.074,24.614)
NetP6_10: P6.3 RN5.3 | length 33.6
  Top Layer w0.127: RN5.3 30.858,21.232 32.463,22.838 v1(32.463,24.003)
  Mid-Layer 1 w0.127: P6.3 8.69,31 12.029,27.661 31.593,27.661 32.431,26.822 32.431,24.035 v1(32.463,24.003)
NetP6_11: P6.2 RN5.5 | length 35.7
  Top Layer w0.127: RN5.5 30.058,21.232 31.853,23.027 v1(31.853,24.614)
  Mid-Layer 1 w0.127: P6.2 6.15,31 9.743,27.407 31.326,27.407 31.821,26.912 31.821,24.646 v1(31.853,24.614)
NetP6_12: P6.1 RN5.7 | length 37.7
  Top Layer w0.127: RN5.7 29.258,21.232 31.242,23.216 v1(31.242,24.003)
  Mid-Layer 1 w0.127: P6.1 3.61,31 7.457,27.153 30.988,27.153 31.242,26.899 v1(31.242,24.003)
NetR1_1: R1.1 R2.2 U1.2 | length 4.5
  Top Layer w0.127: R2.2 R1.1 U1.2
NetR1_2: R1.2 RN1.1 RN1.3 RN1.5 RN1.7 RN2.1 RN2.3 RN2.5 RN2.7 U1.6 | length 28.9
  Top Layer w0.127: R1.2 47.244,23.749 48.069,24.575 50.432,24.575 50.528,24.479 52.788,24.479 54.788,22.479 U1.6
  Top Layer w0.254: U1.6 58.166,22.479 v1(58.395,22.25)
  Bottom Layer w0.254: v1(58.395,22.25) 60.554,22.25 63.092,19.712 RN2.1 RN2.3 RN2.5 RN2.7 73.012,19.712 RN1.7
NetR3_1: R3.1 R4.2 U2.2 | length 7.5
  Top Layer w0.127: v1(10.668,19.787) 10.693,19.812 R4.2 13.843,19.812 R3.1
  Bottom Layer w0.127: v1(10.668,19.787) 12.443,19.787 U2.2
NetR3_2: R3.2 R5.2 U2.1 | length 8.5
  Top Layer w0.127: v1(10.744,18.567) 11.201,18.567 11.862,17.907 13.208,17.907 R3.2
  Bottom Layer w0.127: R5.2 10.262,18.567 v1(10.744,18.567) 10.77,18.542 U2.1
NetR6_1: R6.1 R7.2 U2.6 | length 7.4
  Top Layer w0.127: v1(10.49,24.892) R7.2 13.51,25.527 13.868,25.527 15.011,26.67 R6.1
  Bottom Layer w0.127: v1(10.49,24.892) U2.6
NetR6_2: R6.2 R8.2 U2.7 | length 7.4
  Top Layer w0.127: v1(10.287,26.162) 10.795,26.67 R6.2
  Bottom Layer w0.127: R8.2 v1(10.287,26.162) U2.7
NetR9_1: R9.1 R10.2 U2.11 | length 7.1
  Top Layer w0.127: R9.1 20.78,24.892 R10.2 21.186,24.917 v1(23.343,24.917)
  Bottom Layer w0.127: U2.11 23.317,24.892 v1(23.343,24.917)
NetR9_2: R9.2 R11.2 U2.10 | length 19.3
  Top Layer w0.127: R9.2 22.885,26.797 v1(23.52,26.162)
  Bottom Layer w0.127: R11.2 8.077,23.419 8.941,23.419 9.919,24.397 13.804,24.397 15.569,26.162 U2.10 v1(23.52,26.162)
NetR12_1: R12.1 R13.2 U2.15 | length 7.3
  Top Layer w0.127: R12.1 20.653,19.812 R13.2 23.444,19.812 v1(23.47,19.787)
  Bottom Layer w0.127: U2.15 21.593,19.787 v1(23.47,19.787)
NetR12_2: R12.2 R14.2 U2.16 | length 20.8
  Top Layer w0.127: R12.2 23.012,18.034 v1(23.47,18.491)
  Bottom Layer w0.127: R14.2 8.661,17.501 22.479,17.501 v1(23.47,18.491) 23.419,18.542 U2.16
NetRN1_2: RN1.2 S1.13 | length 2.6
  Top Layer w0.127: S1.13 70.002,19.914 v1(70.002,18.44)
  Bottom Layer w0.127: v1(70.002,18.44) 70.002,18.372 RN1.2
NetRN1_4: RN1.4 S1.14 | length 4.7
  Top Layer w0.127: S1.14 71.247,16.789 v1(71.526,16.51)
  Bottom Layer w0.127: v1(71.526,16.51) 71.539,16.523 RN1.4
NetRN1_6: RN1.6 S1.15 | length 4.8
  Top Layer w0.127: v1(72.39,16.434) 72.517,16.561 S1.15
  Bottom Layer w0.127: RN1.6 72.339,16.485 v1(72.39,16.434)
NetRN1_8: RN1.8 S1.16 | length 2.7
  Top Layer w0.127: S1.16 73.787,18.771 v1(74.066,18.491)
  Bottom Layer w0.127: RN1.8 73.139,17.792 v1@73.838,18.491
NetRN2_2: RN2.2 S1.9 | length 2.8
  Top Layer w0.127: v1(64.846,18.339) 64.846,19.888 S1.9
  Bottom Layer w0.127: v1(64.846,18.339) 65.423,17.762 RN2.2
NetRN2_4: RN2.4 S1.10 | length 4.8
  Top Layer w0.127: S1.10 66.167,16.916 v1(66.523,16.561)
  Bottom Layer w0.127: v1(66.523,16.561) 66.586,16.624 RN2.4
NetRN2_6: RN2.6 S1.11 | length 4.7
  Top Layer w0.127: v1(67.437,16.535) S1.11
  Bottom Layer w0.127: RN2.6 67.386,16.586 v1(67.437,16.535)
NetRN2_8: RN2.8 S1.12 | length 2.5
  Top Layer w0.127: S1.12 68.783,19.863 v1(68.783,18.491)
  Bottom Layer w0.127: RN2.8 68.783,18.359 v1(68.783,18.491)
NetS2_2: S2.2 U3.7 | length 6.1
  Top Layer w0.127: v1(79.045,7.925) 79.045,4.603 S2.2
  Bottom Layer w0.127: U3.7 78.334,8.636 v1(79.045,7.925)
OPTO_INPUT_0: J1.56 RN5.8 | length 19.2
  Top Layer w0.127: RN5.8 29.258,17.981 29.638,17.981 33.09,14.529 44.4,14.529 45.109,13.82 45.109,13.246 J1.56
OPTO_INPUT_1: J1.58 RN5.6 | length 19
  Top Layer w0.127: RN5.6 30.058,17.981 30.438,17.981 33.636,14.783 44.781,14.783 45.744,13.82 45.744,13.246 J1.58
OPTO_INPUT_2: J1.60 RN5.4 | length 18.8
  Top Layer w0.127: RN5.4 30.858,17.981 31.238,17.981 34.182,15.037 45.162,15.037 46.379,13.82 46.379,13.246 J1.60
OPTO_INPUT_3: J1.62 RN5.2 | length 18.7
  Top Layer w0.127: RN5.2 31.658,17.981 32.902,17.981 35.592,15.291 45.543,15.291 47.014,13.82 47.014,13.246 J1.62
OPTO_INPUT_4: J1.66 RN6.8 | length 18.3
  Top Layer w0.127: RN6.8 33.322,17.981 33.702,17.981 36.138,15.545 46.559,15.545 48.284,13.82 48.284,13.246 J1.66
OPTO_INPUT_5: J1.68 RN6.6 | length 18.1
  Top Layer w0.127: RN6.6 34.122,17.981 34.502,17.981 36.684,15.799 46.94,15.799 48.919,13.82 48.919,13.246 J1.68
OPTO_INPUT_6: J1.70 RN6.4 | length 18
  Top Layer w0.127: RN6.4 34.922,17.981 35.302,17.981 37.23,16.053 47.321,16.053 49.554,13.82 49.554,13.246 J1.70
OPTO_INPUT_7: J1.72 RN6.2 | length 17.9
  Top Layer w0.127: RN6.2 35.722,17.981 36.966,17.981 38.64,16.307 47.702,16.307 50.194,13.815 50.455,13.815 J1.72
OPTO_INPUT_8: J1.76 RN7.8 | length 17.5
  Top Layer w0.127: RN7.8 37.386,17.981 37.766,17.981 39.186,16.561 48.718,16.561 51.464,13.815 51.725,13.815 J1.76
OPTO_INPUT_9: J1.78 RN7.6 | length 17.4
  Top Layer w0.127: RN7.6 38.186,17.981 38.566,17.981 39.732,16.815 49.099,16.815 52.099,13.815 52.36,13.815 J1.78
OPTO_INPUT_10: J1.80 RN7.4 | length 17.2
  Top Layer w0.127: RN7.4 38.986,17.981 39.366,17.981 40.278,17.069 49.48,17.069 52.734,13.815 52.995,13.815 J1.80
OPTO_INPUT_11: J1.82 RN7.2 | length 17.1
  Top Layer w0.127: RN7.2 39.786,17.981 40.444,17.323 49.861,17.323 53.369,13.815 53.63,13.815 J1.82
OPTO_OUT_C0: J1.24
OPTO_OUT_C1: J1.28
OPTO_OUT_C2: J1.34
OPTO_OUT_C3: J1.38
OPTO_OUT_E0: J1.26
OPTO_OUT_E1: J1.30
OPTO_OUT_E2: J1.36
OPTO_OUT_E3: J1.40
SLOT0_TCK: J1.102
SLOT0_TDI: J1.96
SLOT0_TDO: J1.98
SLOT0_TMS: J1.100
SLOT_ID0: J1.44 U3.1
SLOT_ID1: J1.46 U3.2
STEP1: J1.95
STEP2: J1.97
pads on no net: J1.7 J1.9 J1.23 J1.25 J1.27 J1.29 J1.49 J1.86 J1.88 J1.90 J1.92 U1.1 U1.5 U1.8 U2.8 U2.9

## Polygon pours and split planes (outlines as drawn)
GND on Internal Plane 1 (split plane): 83.49,11.25 83.49,0.51 74.51,0.51 74.51,11.25 74.501,11.35 74.472,11.445 74.424,11.534 74.361,11.611 74.284,11.674 74.195,11.722 74.1,11.751 74,11.76 15.758,11.76 15.758,13.75 15.757,13.761 15.75,13.891 15.726,14.03 15.687,14.166 15.633,14.297 15.564,14.42 15.483,14.536 15.388,14.641 15.283,14.735 15.168,14.817 15.044,14.885 14.914,14.939 14.778,14.978 14.639,15.002 14.497,15.01 14.356,15.002 14.217,14.978 14.081,14.939 13.951,14.885 13.827,14.817 13.712,14.735 13.606,14.641 13.512,14.536 13.431,14.42 13.362,14.297 13.308,14.166 13.269,14.03 13.245,13.891 13.238,13.761 13.237,13.75 13.237,11.76 10,11.76 9.9,11.751 9.805,11.722 9.716,11.674 9.639,11.611 9.576,11.534 9.528,11.445 9.499,11.35 9.49,11.25 9.49,0.51 0.51,0.51 0.51,33.99 83.49,33.99
+12V on Internal Plane 2 (split plane): 83.49,11.25 83.49,0.51 74.51,0.51 74.51,11.25 74.501,11.35 74.472,11.445 74.424,11.534 74.361,11.611 74.284,11.674 74.195,11.722 74.1,11.751 74,11.76 15.758,11.76 15.758,13.75 15.757,13.761 15.75,13.891 15.726,14.03 15.687,14.166 15.633,14.297 15.564,14.42 15.483,14.536 15.388,14.641 15.283,14.735 15.168,14.817 15.044,14.885 14.914,14.939 14.778,14.978 14.639,15.002 14.497,15.01 14.356,15.002 14.217,14.978 14.081,14.939 13.951,14.885 13.827,14.817 13.712,14.735 13.606,14.641 13.512,14.536 13.431,14.42 13.362,14.297 13.308,14.166 13.269,14.03 13.245,13.891 13.238,13.761 13.237,13.75 13.237,11.76 10,11.76 9.9,11.751 9.805,11.722 9.716,11.674 9.639,11.611 9.576,11.534 9.528,11.445 9.499,11.35 9.49,11.25 9.49,0.51 0.51,0.51 0.51,33.99 83.49,33.99
-12V on Internal Plane 3 (split plane): 83.49,11.25 83.49,0.51 74.51,0.51 74.51,11.25 74.501,11.35 74.472,11.445 74.424,11.534 74.361,11.611 74.284,11.674 74.195,11.722 74.1,11.751 74,11.76 15.758,11.76 15.758,13.75 15.757,13.761 15.75,13.891 15.726,14.03 15.687,14.166 15.633,14.297 15.564,14.42 15.483,14.536 15.388,14.641 15.283,14.735 15.168,14.817 15.044,14.885 14.914,14.939 14.778,14.978 14.639,15.002 14.497,15.01 14.356,15.002 14.217,14.978 14.081,14.939 13.951,14.885 13.827,14.817 13.712,14.735 13.606,14.641 13.512,14.536 13.431,14.42 13.362,14.297 13.308,14.166 13.269,14.03 13.245,13.891 13.238,13.761 13.237,13.75 13.237,11.76 10,11.76 9.9,11.751 9.805,11.722 9.716,11.674 9.639,11.611 9.576,11.534 9.528,11.445 9.499,11.35 9.49,11.25 9.49,0.51 0.51,0.51 0.51,33.99 83.49,33.99

## Silkscreen, mask and mechanical layers (free items; w line width, h text height)
Top Overlay:
  text "1 Hz" at 6.325,14.503 h0.76
  text "GPS" at 6.248,13.259 h0.76
  text "PGM" at 83.236,5.385 h0.76 r90
Bottom Overlay:
  lines w0.2: 60.452,25.146 61.722,24.384
Mechanical 13:
  lines w0.2: -3.5,-1.5 89,-1.5 ; 74,11.25 74,0 84,0 84,11.25
  lines w0.254: 10,11.25 10,0 0,0 0,9.25 0,16.75 0,34.5 84,34.5 84,20.75 84,11.25 ; 15.247,11.25 42,11.25 74,11.25
  text "Top of Baseboard" at 20.5,-3.25 h1.27

## Dimensions
0,0 to 0,34.5 on Mechanical 13
0,0 to 10,0 on Mechanical 13
0,34.5 to 84,34.5 on Mechanical 13
84,11.25 to 84,34.5 on Mechanical 13
-3.5,-1.5 to -3,34.5 on Mechanical 13

## Text inside footprints (layer, text, board x,y; h text height)
J1: Bottom Overlay "1" at 21.16,14.605 h0.76; Bottom Overlay "PC01" at 16.944,14.554 h0.76